# Altium PCB Buck-V1.0.PcbDoc (part 2 of 2)
Units mil, origin at the board's own origin, x right, y up, seen from the top; angles counter-clockwise.
Board outline 6000 x 4000 mil, 2 copper layers (Top Layer, Bottom Layer); 329 components, 177 nets, 875 pads, 6 vias.
Unrouted connection lines stored in the file: 586.
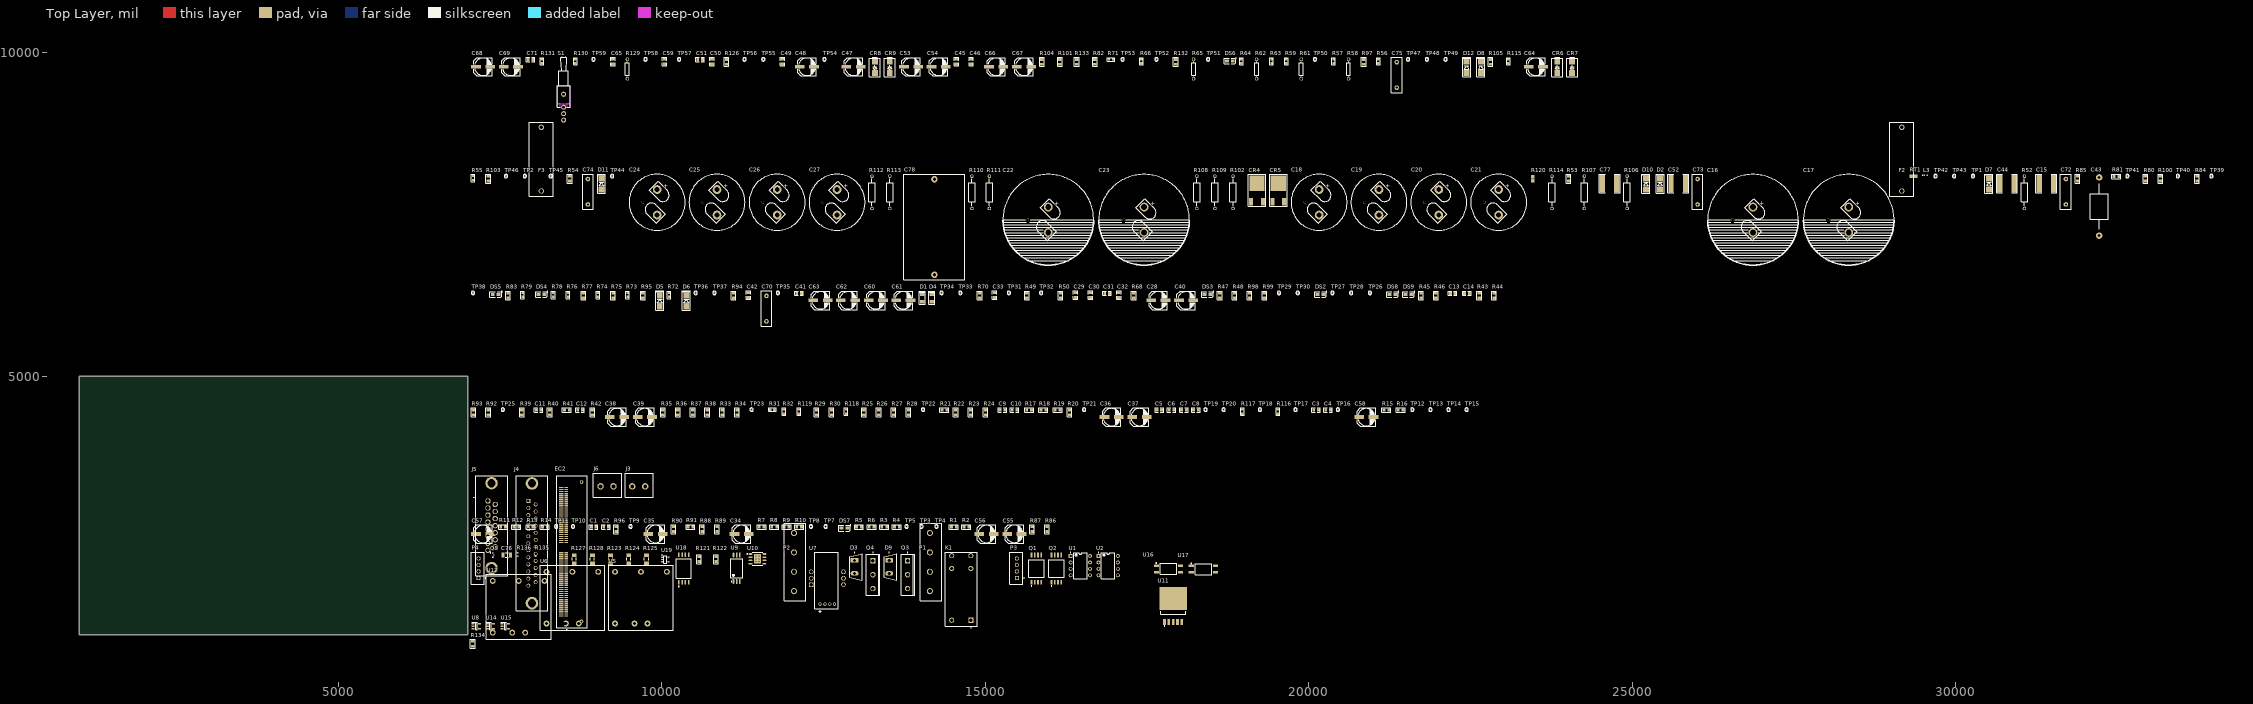
[diagram p0: Top Layer view]

## Part data (continued)
U19: library part CMP-0272-00853-3, "Precision, 20 MHz, 0.9 pA Ib, RRIO, CMOS Operational Amplifier, 1.8 to 5.5 V, -40 to 125 degC, 5-pin SOT23 (DBV5), Green (RoHS & no Sb/Br)", Manufacturer="Texas Instruments", PartNumber=OPA320AIDBVR, Total Supply Voltage(Max)(+5V is 5, +/-5V is 10)=5.5, Total Supply Voltage(Min)(+5V is 5, +/-5V is 10)=1.8, CMRR(Min)(dB)=100, Code_JEDEC=MO-178, ComponentLink1Description="Manufacturer URL", ComponentLink1URL=http://www.ti.com/, ComponentLink2Description=Datasheet, ComponentLink2URL=http://www.ti.com/general/docs/lit/getliterature.tsp?genericPartNumber=OPA320&fileType=pdf, ComponentLink3Description="Package Specification", ComponentLink3URL=http://www.ti.com/litv/pdf/mpds018i, DatasheetVersion=SBOS513D, Eco-Plan="Green (RoHS & no Sb/Br)", IIB(Max)(pA)=0.9, Iq per channel(Max)(mA)=1.75, Mounting Technology="Surface Mount", Number of Channels=2, Offset Drift(Typ)(uV/C)=1.5, PackageDescription="5-Pin Plastic Small Outline, Body 1.6 x 2.9 mm, Pitch 0.95 mm", PackageReference=DBV0005A, PackageVersion="4073253-4/K, 03/2006", Slew Rate(Typ)(V/us)=10, Sub Family="High Output Current Amplifier (>=50mA), Low Input Bias Current Amp (<=10pA), Low Noise Amp (<=10nV/rtHz), Low Offset Voltage Amplifier (<=500uV), Low Supply Voltage Amplifier (<=2.7V), Precision Amplifier", Vio (25C)(Max)(mV)=0.15, Vn at 1kHz(Typ)(nV/rtHz)=8.5
L3: Code_IEC=1005, Code_JEITA=0402, LatestRevisionDate=29-May-2009, LatestRevisionNote="IPC-7351 Footprint Added.", PackageDescription="Chip Inductor", PackageReference=0402-A, Published=8-Jun-2000, Publisher="Altium Limited"

## Via types
v1: diameter 19.68, hole 7.87, Top Layer to Bottom Layer, 6 vias

## Nets (pads, with @x,y where several pads share a name; then routed paths per layer and width w, separated by ;. In a path a pad name is that pad's centre, name@x,y a point inside that pad or via, vN(x,y) a via of type N, cw(c..) or ccw(c..) an arc to the next point about the centre after c; other vN are vias at no path point)
1: J5.10 P4.1
2: J5.3 P4.2
3: J4.2 P4.3
4: J4.15 P4.4
+3.3VD: C28.1 C32.2 C47.1 C49.2 C76.2 DS2.1 R83.1 R86.1 R87.1 R89.2 R91.2 R92.1 R93.1 R94.2 R95.2 R97.2 R131.2 R135.1 TP28.1 U11.4 U11.5 U18.8 U19.5
+5V_MICRO: C29.2 C33.2 C42.2 C48.1 C68.1 C69.1 C71.1 DS3.1 EC2.9 EC2.23 EC2.37 EC2.73 J4.1 J4.14 J5.1 J5.9 R1.1 R2.1 R43.2 R44.2 R57.1 R72.1 R73.1 R84.1 R88.2 R90.2 R130.2 R134.1 U7.7 U12.3 U18.1
"+12V_Digital IN": C35.1 C36.1 C38.1 C40.1 C60.1 C61.1 D1.1 J3.1 K1.A2 TP27.1 U5.1 U6.1 U12.1
"E FB TEMP": EC2.97 J4.6
Earth: C70.1 C72.1 C73.1 C74.1 C75.1
"Fan command": EC2.60 J5.4
"Fan FB command": EC2.18 J4.16
"FB TEMP of the heatsink": EC2.109 J4.23
GND_DIGITAL: C3.2 C4.2 C9.2 C10.2 C28.2 C29.1 C30.1 C31.1 C32.1 C33.1 C41.1 C42.1 C47.2 C48.2 C49.1 C51.1 C55.2 C56.2 C57.2 C58.2 C59.1 C62.2 C63.2 C64.2 C65.1 C68.2 C69.2 C70.2 C71.2 C76.1 EC2.10 EC2.24 EC2.38 EC2.56 EC2.74 EC2.75 EC2.83 EC2.86 EC2.92 EC2.99 EC2.102 EC2.105 EC2.108 EC2.111 EC2.114 J4.13 J4.25 J5.8 J5.15 Q1.5 Q2.5 Q5.2 R3.2 R4.2 R5.2 R6.2 R26.2 R28.2 R33.2 R34.2 R49.2 R50.2 R56.1 R64.1 R66.1 R68.2 R70.2 R71.1 R78.1 R79.1 R80.2 R81.2 R82.2 R85.2 R100.2 R101.2 R129.1 R132.2 R133.2 R136.2 S1.1 TP31.1 TP32.1 TP34.1 TP41.1 TP50.1 TP53.1 TP59.1 U7.8 U8.3 U9.3 U11.3 U11.6 U12.5 U14.3 U15.3 U16.2 U17.2 U18.3 U18.4 U18.5 U19.2
"GND_High voltage-out": C22.2 C23.2 C24.2 C25.2 C26.2 C27.2 C72.2 C78.1 CR4.1 D3.2 D9.2 P1.3 P1.4 P2.3 P2.4 R11.1 R12.1 R13.1 R14.1 R102.2 R110.2 R111.2 R112.2 R113.2 R114.2 R116.2 R117.2 R120.1 TP2.1 TP12.1 TP14.1 TP44.1 TP45.1
GND_IN: C35.2 C36.2 C38.2 C40.2 C60.2 C61.2 C73.2 J3.2 TP33.1 TP38.1 U5.2 U6.2 U12.2 U16.3 U17.3
GND_MB: C34.2 C45.1 C66.2 C67.2 CR7.1 R63.2 R96.2 R115.2 TP9.1 TP51.1 U9.4
"GND_VDD Sensor voltage input": C37.2 C75.2 R31.1 R99.2 R118.1 TP21.1 U5.5
"GND_VDD Sensor voltage out": C39.2 C74.2 R32.1 R98.2 R119.1 TP25.1 U6.5
"Input 500V": F2.1 P1.1 P1.2 R7.2 R8.2 R120.2 TP3.1 TP42.1
"Input voltage of Buck": EC2.106 J5.14 TP29.1
"Input voltage of FB": EC2.103 J4.24
"M1 command": EC2.72 J5.12 R101.1 TP47.1
"M1 FB command": EC2.34 J4.4
"M2 FB command": EC2.36 J4.17
"M3 FB command": EC2.40 J4.5
"M4 FB command": EC2.42 J4.18
MCU_Reset: EC2.1 J5.2 S1.2
NetC1_1: C1.1 Q1.6 R22.2 R25.1 TP18.1
NetC1_2: C1.2 R15.2
NetC2_1: C2.1 Q2.6 R24.2 R27.1 TP17.1
NetC2_2: C2.2 R16.2
NetC3_1: C3.1 C58.1 Q1.8 R88.1 R89.1 TP8.1
NetC4_1: C4.1 C57.1 Q2.8 R90.1 R91.1
NetC5_1: C5.1 Q1.2 R7.1 R8.1 R11.2 R12.2 TP7.1
NetC5_2: C5.2 C6.2 Q1.4 R117.1 R118.2
NetC7_1: C7.1 Q2.2 R9.1 R10.1 R13.2 R14.2 TP11.1
NetC7_2: C7.2 C8.2 Q2.4 R116.1 R119.2
NetC13_2: C13.2 R45.2 R47.1
NetC14_2: C14.2 R46.2 R48.1
NetC15_1: C15.1 C43.1 C44.1 R52.1
NetC15_2: C15.2 C43.2 C44.2 C52.1 C53.2 C54.2 C77.2 CR8.1 D3.1 D9.1 L3.1 Q3.3 Q4.3 R53.2 R54.2 R63.1 R104.1 R115.1 U10.4 U10.5
NetC16_1: C16.1 C17.1 C78.2 K1.11 Q3.2 Q4.2 R52.2 R106.1 R107.1 RT1.1 TP43.1
NetC16_2: C16.2 C17.2 C22.1 C23.1
NetC18_2: C18.2 C19.2 C20.2 C21.2 C24.1 C25.1 C26.1 C27.1
NetC30_2: C30.2 C31.2 U11.1 U11.2
NetC41_2: C41.2
NetC46_1: C46.1 R122.2 R126.1 U19.1
NetC46_2: C46.2 R121.1 R125.2 TP54.1 U19.4
NetC50_1: C50.1 R127.2 R128.1
NetC50_2: C50.2 R124.2 R125.1
NetC51_2: C51.2 R126.2 TP56.1
NetC52_2: C52.2 R114.1
NetC59_2: C59.2 R123.2 U18.2
NetC62_1: C62.1 R72.2 R94.1 U14.5
NetC63_1: C63.1 R73.2 R95.1 U15.5
NetC64_1: C64.1 R57.2 R97.1 U8.5
NetC65_2: C65.2 R128.2 R129.2 TP57.1 U19.3
NetC77_1: C77.1 R102.1
NetCR4_2: CR4.2 CR5.2
NetCR5_1: CR5.1 F2.2 K1.14 RT1.2
NetCR6_1: CR6.1 CR7.2 R61.1 R104.2 TP49.1 U9.5
NetCR8_2: CR8.2 CR9.1 R58.1 R65.1 TP52.1 U10.6 U10.7
NetD1_2: D1.2 D5.2
NetD2_C: Q3.1 Q4.1 R53.1 R54.1 R62.2 R103.2 R105.2
NetD4_1: D4.1 P3.1
NetD4_2: D4.2 D6.2
NetD6_1: D6.1 P3.2
NetD8_A: R103.1 R105.1
NetDS2_2: DS2.2 R68.1
NetDS3_2: DS3.2 R70.1
NetDS4_1: DS4.1 R75.1 U14.4
NetDS4_2: DS4.2 R80.1
NetDS5_1: DS5.1 R77.1 TP37.1 U15.4
NetDS5_2: DS5.2 R81.1
NetDS6_1: DS6.1 TP48.1 U8.4
NetDS6_2: DS6.2 R82.1
NetDS7_2: DS7.2 R96.1
NetDS8_2: DS8.2 R98.1
NetDS9_2: DS9.2 R99.1
NetEC2_57: EC2.57 Q5.1
NetEC2_59: EC2.59 R134.2 R136.1
NetEC2_64: EC2.64
NetEC2_65: EC2.65
NetEC2_66: EC2.66
NetEC2_67: EC2.67
NetEC2_68: EC2.68
NetEC2_69: EC2.69
NetEC2_70: EC2.70
NetEC2_71: EC2.71
NetEC2_94: EC2.94
NetEC2_95: EC2.95
NetEC2_96: EC2.96
NetEC2_100: EC2.100
NetF3_1: F3.1 U7.4 U7.5 U7.6
NetF3_2: F3.2 P2.1 P2.2
NetFB1_2: R59.1 R133.1
NetFB3_2: 
NetFB4_2: R74.1
NetFB5_2: R76.1
NetFB6_1: R47.2 R49.1
NetFB7_1: R48.2 R50.1
NetFB8_1: 
NetFB9_1: P3.4 R85.1
NetJ6_2: J6.2 U7.1 U7.2 U7.3
NetP3_3: P3.3 R83.2 R84.2
NetQ1_3: Q1.3 R31.2
NetQ1_7: Q1.7 R15.1 R21.2 TP13.1
NetQ2_3: Q2.3 R32.2
NetQ2_7: Q2.7 R16.1 R23.2 TP15.1
NetQ5_3: Q5.3 R135.2
NetR17_1: R17.1 R18.2
NetR18_1: R18.1 R26.1 R29.1
NetR19_1: R19.1 R20.2
NetR20_1: R20.1 R28.1 R30.1
NetR29_2: R29.2 R36.1 R43.1 R93.2
NetR30_2: R30.2 R38.1 R44.1 R92.2
NetR35_1: R35.1 R36.2
NetR37_1: R37.1 R38.2
NetR55_1: R55.1 R56.2 R123.1 TP46.1
NetR55_2: R55.2 U7.9
NetR58_2: R58.2 R62.1 R65.2
NetR59_2: R59.2 U8.2
NetR60_2: R132.1 U9.1
NetR61_2: R61.2 U10.2
NetR64_2: R64.2 U8.1
NetR66_2: R66.2 U9.2
NetR71_2: R71.2 U10.3
NetR74_2: R74.2 U14.2
NetR75_2: R75.2 U17.1
NetR76_2: R76.2 U15.2
NetR77_2: R77.2 U16.1
NetR78_2: R78.2 U14.1
NetR79_2: R79.2 U15.1
NetR106_2: R106.2 R110.1
NetR107_2: R107.2 R111.1
NetR108_2: R108.2 R109.2 R112.1 R113.1
NetR121_2: R121.2 R122.1
NetR124_1: R124.1 U18.6
NetR127_1: R127.1 TP55.1 U18.7
NetR130_1: R130.1 R131.1 S1.3
"Output 500V": C18.1 C19.1 C20.1 C21.1 J6.1 L3.2 R9.2 R10.2 R108.1 R109.1 TP1.1 TP4.1
"Output Current of FB to micro controller": EC2.101 J4.12
"Output Current to micro controller": EC2.104 J5.7
"Output voltage of Buck": EC2.110 J5.6 TP30.1
"Output voltage of FB": EC2.107 J4.11
"P1 OP37": R17.2 U1.1
"P1 OP37-2": R19.2 U2.1
"P2 OP37": C11.1 R22.1 R25.2 R39.2 R40.2 U1.2
"P2 OP37-2": C12.1 R24.1 R27.2 R41.2 R42.2 U2.2
"P3 OP37": C9.1 R21.1 R33.1 U1.3
"P3 OP37-2": C10.1 R23.1 R34.1 U2.3
"P4 OP37": R3.1 U1.4
"P4 OP37-2": R4.1 U2.4
"P5 OP37": R5.1 U1.5
"P5 OP37-2": R6.1 U2.5
"P6 OP37": C11.2 C13.1 R39.1 R40.1 R45.1 TP19.1 U1.6
"P6 OP37-2": C12.2 C14.1 R41.1 R42.1 R46.1 TP20.1 U2.6
"P7 OP37": C55.1 R1.2 R87.2 U1.7
"P7 OP37-2": C56.1 R2.2 R86.2 U2.7
"P8 OP37": R35.2 U1.8
"P8 OP37-2": R37.2 U2.8
"Relay 2": D5.1 K1.A1 TP39.1 U16.4
"Relay command": EC2.54 J5.11 R100.1 TP36.1
"Relay FB command": EC2.16 J4.3
"Spare Analog FB 1": J4.10
"Spare Analog FB 2": J4.22
"Spare Analog FB 3": J4.9
"Spare Analog FB 4": J4.21
"Spare Dig FB 1": J4.19
"Spare Dig FB 2": J4.7
"Spare Dig FB 3": J4.20
"Spare Dig FB 4": J4.8
TEMP: EC2.98 J5.5
"TEMP of the heatsink": EC2.112 J5.13
"VDD Sensor voltage input": C6.1 C37.1 DS9.1 Q1.1 TP10.1 TP16.1 U5.3
"VDD Sensor voltage out": C8.1 C39.1 DS8.1 Q2.1 TP22.1 U6.3
"VGS B": C34.1 C45.2 C53.1 C54.1 C66.1 C67.1 CR6.2 CR9.2 DS7.1 TP5.1 U9.6 U10.1 U10.8
pads on no net: C16.0 C17.0 C18.0 C19.0 C20.0 C21.0 C22.0 C23.0 C24.0 C25.0 C26.0 C27.0 D2.1 D2.2 D7.1 D7.2 D8.1 D8.2 D10.1 D10.2 D11.1 D11.2 D12.1 D12.2 EC2.2 EC2.3 EC2.4 EC2.5 EC2.6 EC2.7 EC2.8 EC2.11 EC2.12 EC2.13 EC2.14 EC2.15 EC2.17 EC2.19 EC2.20 EC2.21 EC2.22 EC2.25 EC2.26 EC2.27 EC2.28 EC2.29 EC2.30 EC2.31 EC2.32 EC2.33 EC2.35 EC2.39 EC2.41 EC2.43 EC2.44 EC2.45 EC2.46 EC2.47 EC2.48 EC2.49 EC2.50 EC2.51 EC2.52 EC2.53 EC2.55 EC2.58 EC2.61 EC2.62 EC2.63 EC2.76 EC2.77 EC2.78 EC2.79 EC2.80 EC2.81 EC2.82 EC2.84 EC2.85 EC2.87 EC2.88 EC2.89 EC2.90 EC2.91 EC2.93 EC2.113 EC2.115 EC2.116 EC2.117 EC2.118 EC2.119 EC2.120 EC2.MH1 EC2.MH2 EC2.MH3 EC2.MH4 J4.MH1 J4.MH2 J5.MH1 J5.MH2 S1.M TP23.1 TP26.1 TP35.1 TP40.1 TP58.1 U5.4 U5.6 U6.4 U6.6 U7.10 U10.9 U12.4 U12.6 U17.4
copper on no net:
  other v1: 11458.35,2131.69 11501.65,2131.69 11458.35,2175 11501.65,2175 11458.35,2218.31 11501.65,2218.31

## Text inside footprints (layer, text, board x,y; h text height)
C16: Top Overlay "+" at 26975.24,7702.4 h60 r270
C17: Top Overlay "+" at 28455.24,7702.4 h60 r270
C18: Top Overlay "+" at 20270.24,7972.4 h60 r270
C19: Top Overlay "+" at 21195.24,7972.4 h60 r270
C20: Top Overlay "+" at 22120.24,7972.4 h60 r270
C21: Top Overlay "+" at 23045.24,7972.4 h60 r270
C22: Top Overlay "+" at 16085.24,7702.4 h60 r270
C23: Top Overlay "+" at 17565.24,7702.4 h60 r270
C24: Top Overlay "+" at 10040.24,7972.4 h60 r270
C25: Top Overlay "+" at 10965.24,7972.4 h60 r270
C26: Top Overlay "+" at 11895.24,7972.4 h60 r270
C27: Top Overlay "+" at 12820.24,7972.4 h60 r270